# EAGLE board Pow_bank_vero_ckt (EAGLE 7.7.0)
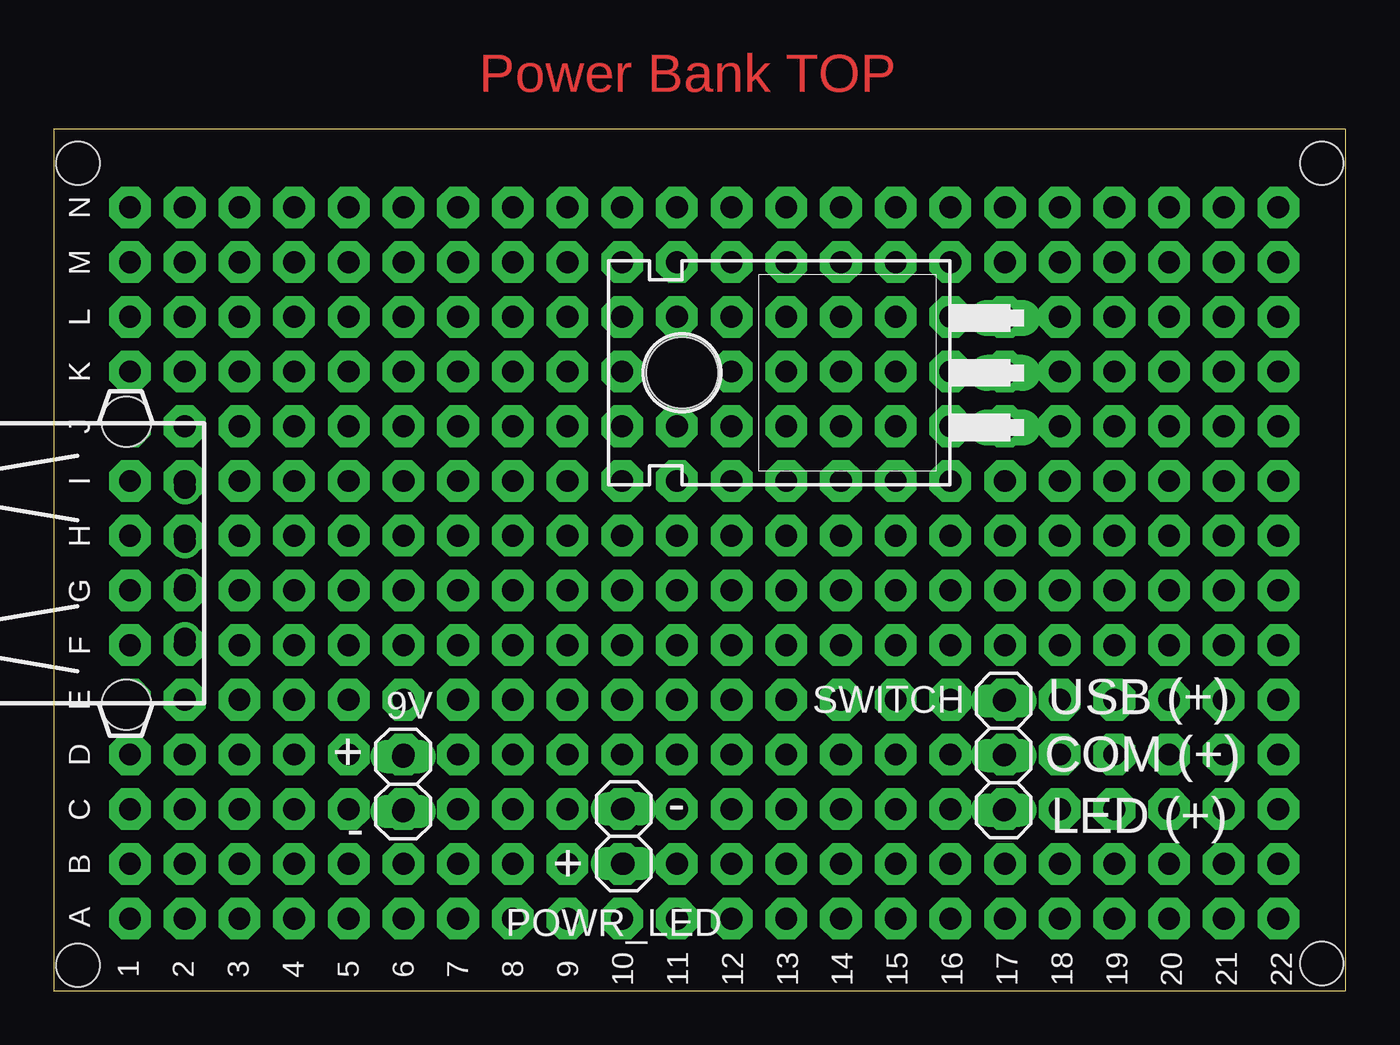
[diagram p0: board, top side]
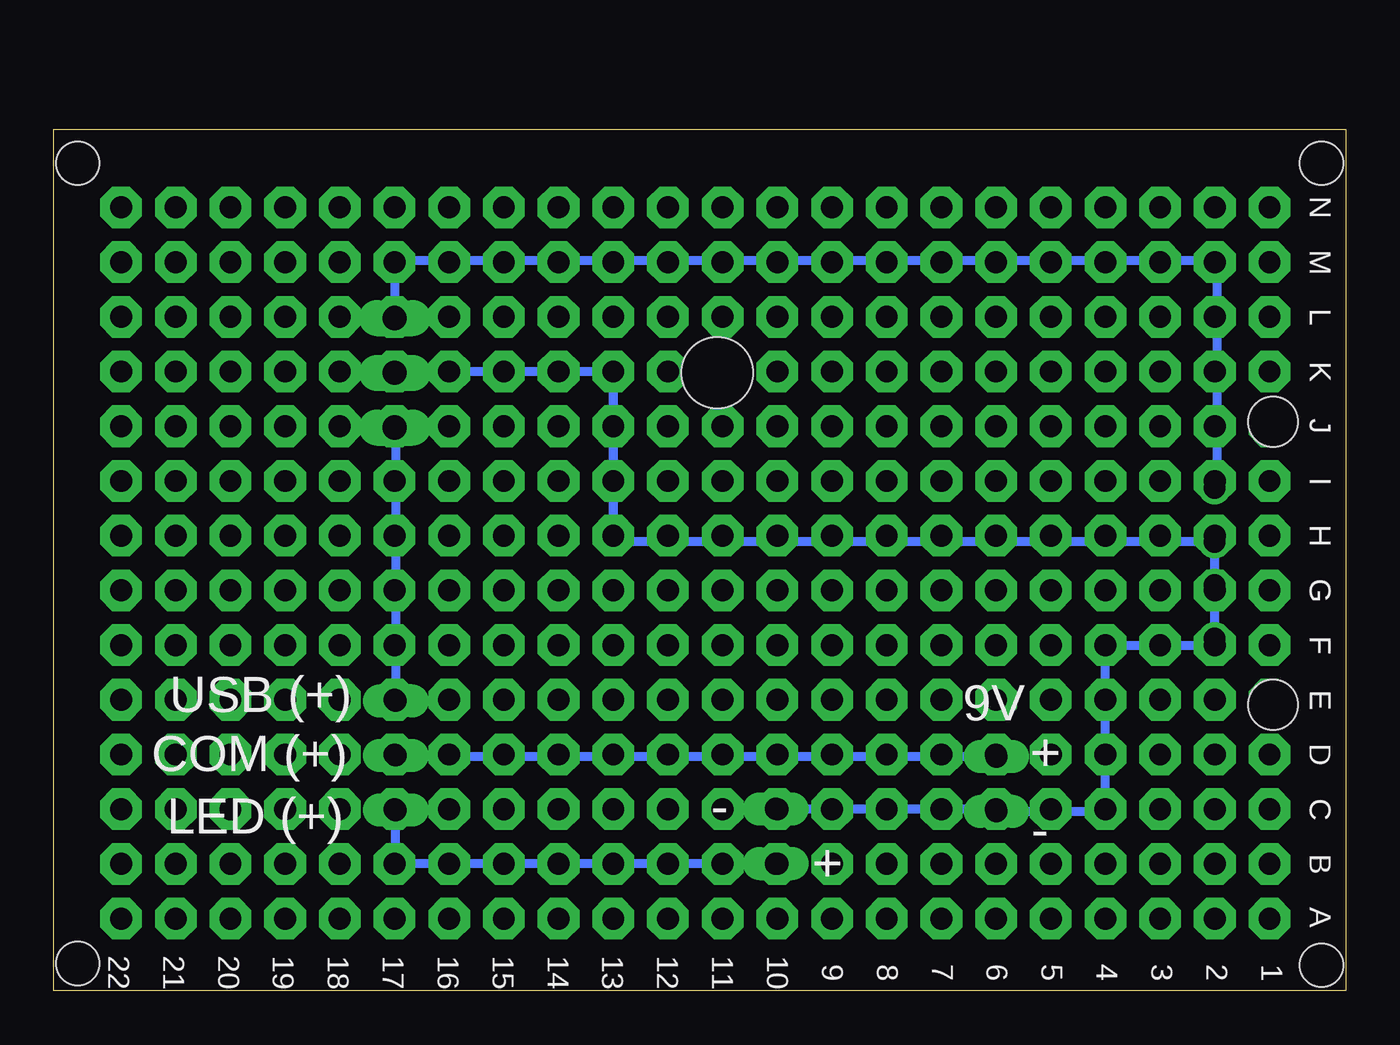
[diagram p1: board, bottom side, seen from below]

Size 60 x 40 mm. Coordinates in mm from the lower left corner, seen from the top.
Outline: 0,0 60,0 60,40 0,40 0,0
Copper layers (1*16): Top 0.035mm / dielectric 1.5mm / Bottom 0.035mm
Design rules "default": minimum track width 10mil, minimum drill 24mil, track to track 8mil, track to pad 8mil, pad to pad 8mil, via to via 8mil, smd to smd 8mil, copper to edge 40mil, drill to drill 8mil, minimum pad ring 10mil, minimum via ring 8mil, stop-mask expansion 4mil, vias tented up to drill 0mil, thermal gap 10mil
Holes 2 mm at 58.89,1.27 58.89,38.43 1.12,1.19 1.12,38.43

## Footprints (pad centres in the part's own frame; a part is rotated, then mirrored left to right if it is on the bottom)
1X14 = drill 1.016 pad 1.93 octagon: 1 -16.51,0; 2 -13.97,0; 3 -11.43,0; 4 -8.89,0; 5 -6.35,0; 6 -3.81,0; 7 -1.27,0; 8 1.27,0; 9 3.81,0; 10 6.35,0; 11 8.89,0; 12 11.43,0; 13 13.97,0; 14 16.51,0
1X02 = drill 1.016 long: 1 -1.27,0; 2 1.27,0
TO220H = drill 1.118 long: 1 -2.54,-10.16; 2 0,-10.16; 3 2.54,-10.16 | hole 3.302: 0,4.826
1X03 = drill 1.016 long: 1 -2.54,0; 2 0,0; 3 2.54,0
USB = drill 1: 1 -3.5,12.99; 2 -1,12.99; 3 1,12.99; 4 3.5,12.99 | hole 2.3: -6.57,10.28; 6.57,10.28

## Placement (x,y rotation side)
1  [1X14]  3.54,19.86 90 top
2  [1X14]  6.08,19.86 90 top
4  [1X14]  11.16,19.86 90 top
9V  [1X02]  16.22,9.6 270 top
IC1  7805T  [TO220H]  34.01,28.7 90 top
JP3  [1X14]  8.62,19.86 90 top
JP5  [1X14]  13.7,19.86 90 top
JP6  [1X14]  16.24,19.86 90 top
JP7  [1X14]  18.78,19.86 90 top
JP8  [1X14]  21.32,19.86 90 top
JP9  [1X14]  23.86,19.86 90 top
JP10  [1X14]  26.4,19.86 90 top
JP11  [1X14]  28.94,19.86 90 top
JP12  [1X14]  31.48,19.86 90 top
JP13  [1X14]  34.02,19.86 90 top
JP14  [1X14]  36.56,19.86 90 top
JP15  [1X14]  39.1,19.86 90 top
JP16  [1X14]  41.64,19.86 90 top
JP17  [1X14]  44.18,19.86 90 top
JP18  [1X14]  46.72,19.86 90 top
JP19  [1X14]  49.26,19.86 90 top
JP20  [1X14]  51.8,19.86 90 top
JP21  [1X14]  54.34,19.86 90 top
JP22  [1X14]  56.88,19.86 90 top
POWR_LED  [1X02]  26.47,7.18 90 top
SWITCH  [1X03]  44.12,10.93 270 top
X1  [USB]  -6.91,19.85 270 top

## Library data of the parts
1 2 4 JP3 JP5-JP22 = pinhead_1x14_no_frame
9V POWR_LED SWITCH = pinhead
IC1 = linear
X1 = con-amp

## Nets
GND: 9V.2 IC1.2 POWR_LED.2 X1.2 X1.3 X1.4
N$1: IC1.1 SWITCH.1
N$2: IC1.3 X1.1
N$3: POWR_LED.1 SWITCH.3
VCC: 9V.1 SWITCH.2

## Tracks (layer width: path | path; a pad name or v marks a point on that pad's centre or on a via)
GND
  Bottom 0.406: IC1.2 44.17,28.74 34.01,28.74 34.01,20.85 X1.2 X1.3 X1.4 6.08,16.04 11.17,16.04 11.17,8.41 11.34,8.41 11.34,8.33 9V.2 16.22,8.45 POWR_LED.2
N$1
  Bottom 0.406: IC1.1 44.12,26.16 SWITCH.1
N$2
  Bottom 0.406: X1.1 5.96,23.35 5.96,33.89 44.54,33.89 44.54,34.08 44.17,34.08 IC1.3
N$3
  Bottom 0.406: POWR_LED.1 44.12,5.91 SWITCH.3
VCC
  Bottom 0.406: 9V.1 44.12,10.87 SWITCH.2

## Text on the board
Top: Power Bank TOP
tPlace: N | M | L | K | J | I | H | G | F | E | USB (+) | D | + | COM (+) | C | - | - | LED (+) | B | + | A | 1 / 2 / 3 / 4 / 5 / 6 / 7 / 8 / 9 / 10 / 11 / 12 / 13 / 14 / 15 / 16 / 17 / 18 / 19 / 20 / 21 / 22
bPlace: N | M | L | K | J | I | H | G | F | E | 9V | USB (+) | D | + | COM (+) | C | - | - | LED (+) | B | + | A | 1 / 2 / 3 / 4 / 5 / 6 / 7 / 8 / 9 / 10 / 11 / 12 / 13 / 14 / 15 / 16 / 17 / 18 / 19 / 20 / 21 / 22